# Altium PCB PCB2.PcbDoc
Units mm, origin at the board's own origin, x right, y up, seen from the top; angles counter-clockwise.
Board outline 152.4 x 101.6 mm, 4 copper layers (Top Layer, Layer 1, Layer 2, Bottom Layer), stack 0.568 mm thick; 58 components, 36 nets, 144 pads, 0 vias.
Unrouted connection lines stored in the file: 105.
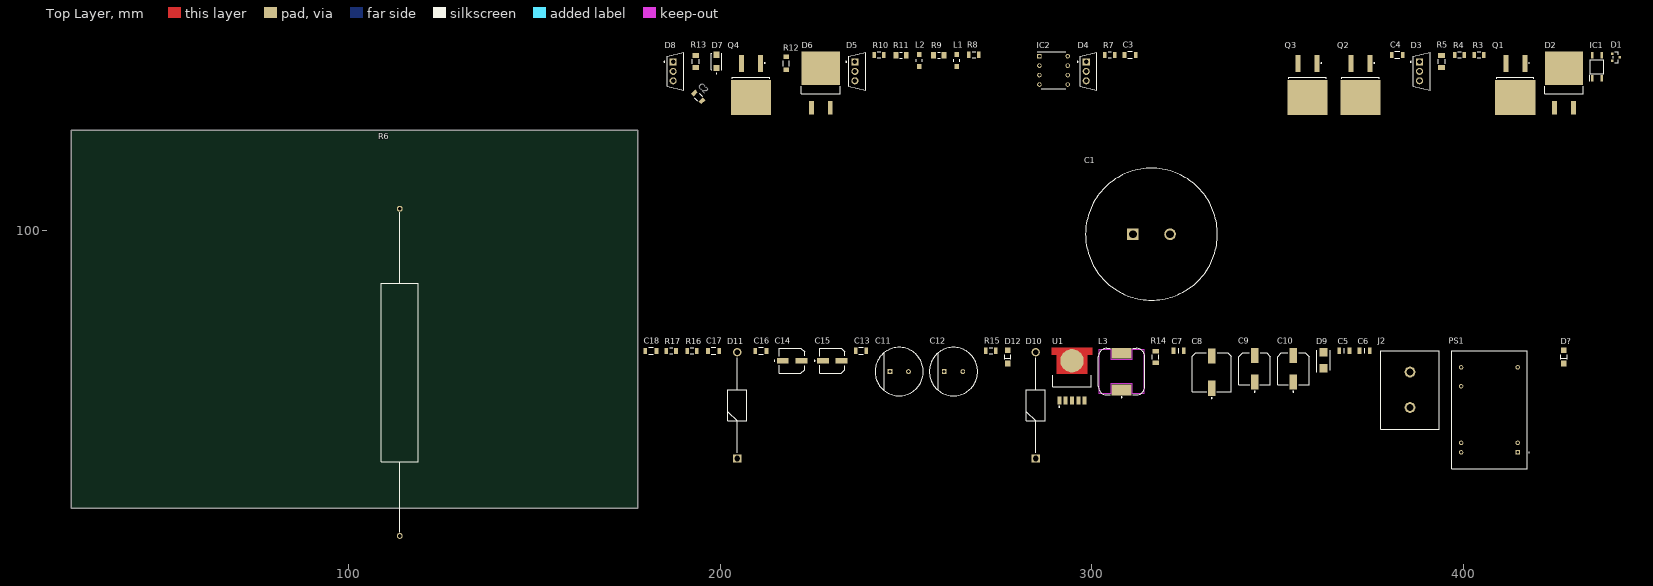
[diagram p0: Top Layer view]
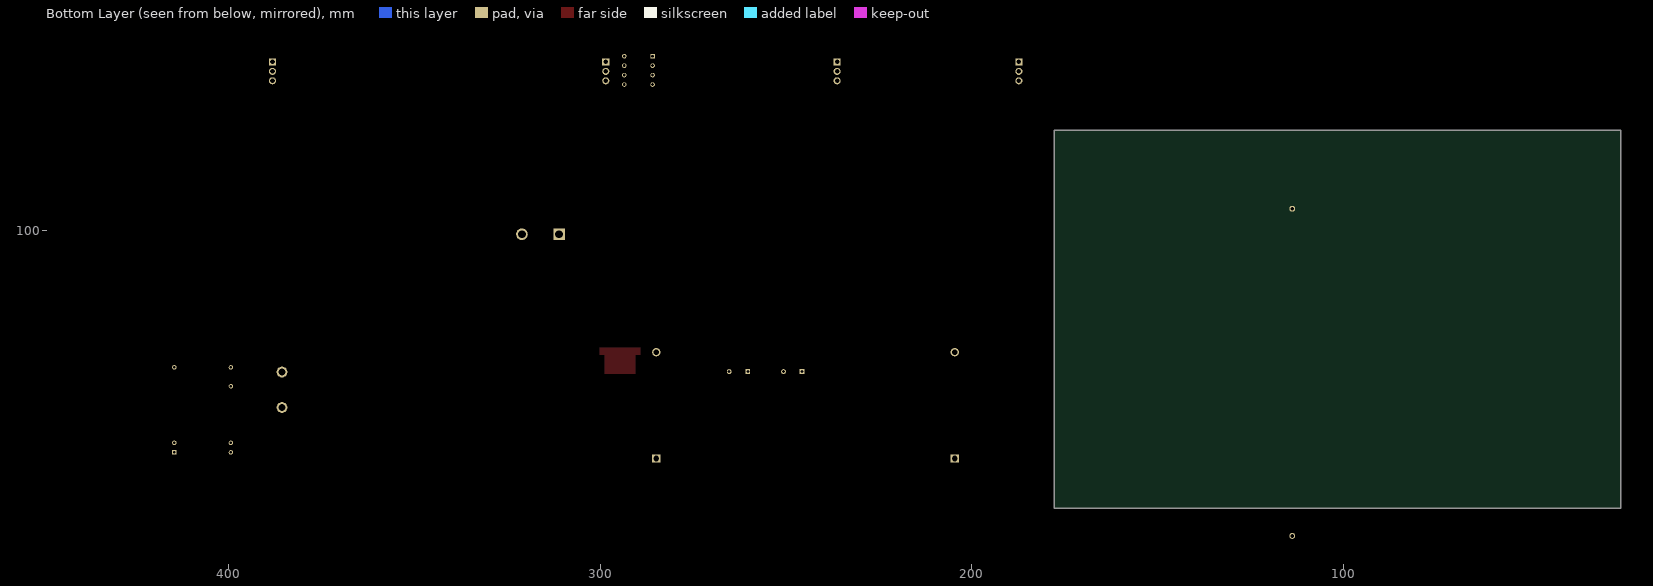
[diagram p1: Bottom Layer view, seen from below]
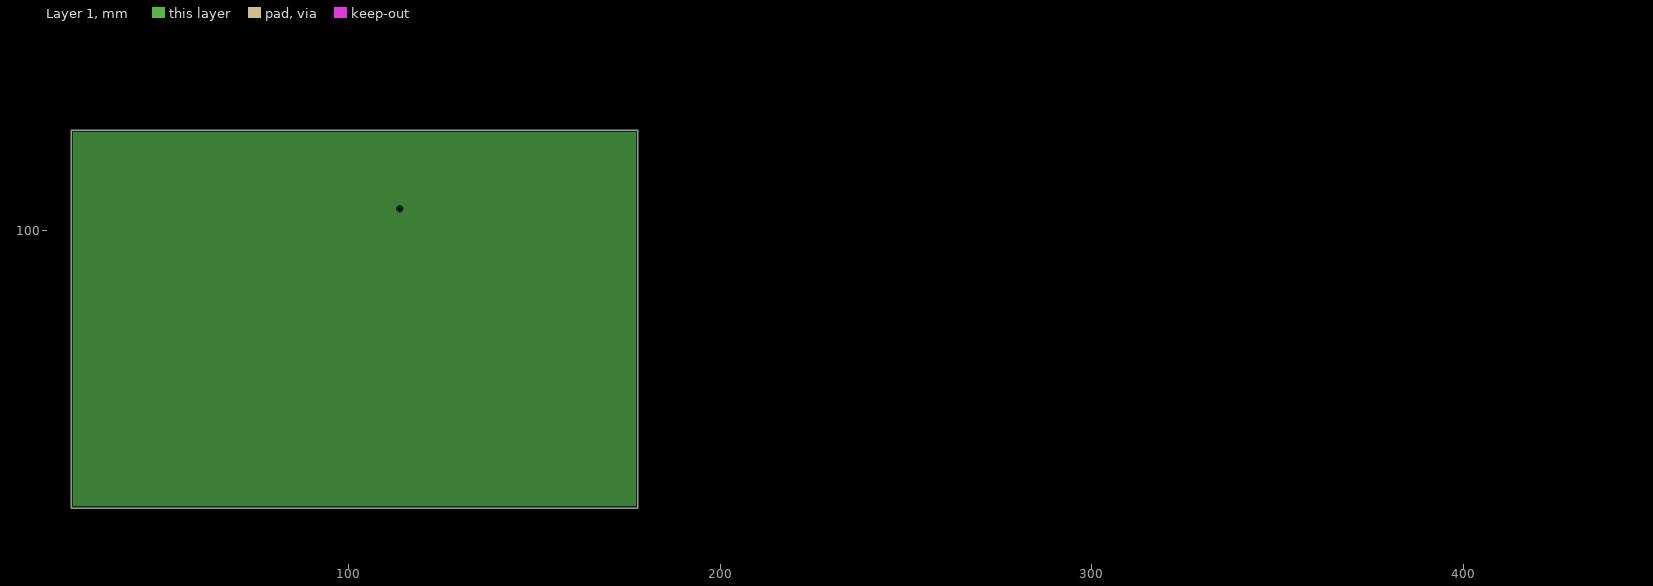
[diagram p2: Layer 1, clearances drawn from the general rule]

## Layer stack, top to bottom
Top Solder: solder mask 0.0102, Solder Resist, Dk 3.5
Top Layer: signal copper 0.0356
Dielectric 2: prepreg 0.0711, PP-006, Dk 4.1
Layer 1: plane copper 0.0175
Dielectric 1: dielectric 0.32, FR-4, Dk 4.8
Layer 2: signal copper 0.0175
Dielectric 3: prepreg 0.0711, PP-006, Dk 4.1
Bottom Layer: signal copper 0.0356
Bottom Solder: solder mask 0.0102, Solder Resist, Dk 3.5

## Board outline
25.4,25.4 177.8,25.4 177.8,127 25.4,127

## Design rules (kind name [scope] priority, off if disabled: settings)
AssemblyTestPointUsage [All] p1 off:
AssemblyTestpoint [All] p1 off: testpointundercomponent=TRUE minsize=1.016 maxsize=2.54 preferedsize=1.524 minholesize=0 maxholesize=1.016 preferedholesize=0.813 testpointgrid=0.025 usegrid=TRUE gridtolerance=0 allowsidetop=TRUE allowsidebottom=TRUE
Clearance Clearance_1 [All vs InPolygon] p1: gap=0.33 ignorepadtopadclearanceinfootprint=FALSE except(0: Arc-Hole Track-Hole SMDPad-Hole THPad-Hole Via-Hole Fill-Hole Poly-Hole Region-Hole Text-Hole)
Clearance [All] p2: gap=0.178 ignorepadtopadclearanceinfootprint=FALSE except(0: Arc-Hole Track-Hole SMDPad-Hole THPad-Hole Via-Hole Fill-Hole Poly-Hole Region-Hole Text-Hole)
ComponentClearance [All] p1 off: gap=0.254 collisioncheckmode=3 verticalgap=0.254 showdistances=FALSE
FabricationTestPointUsage [All] p1 off: valid=0 allowmultiple=FALSE
FabricationTestpoint [All] p1 off: side=3 testpointundercomponent=TRUE minsize=1.016 maxsize=2.54 preferedsize=1.524 minholesize=0 maxholesize=1.016 preferedholesize=0.813 testpointgrid=0.025 allowsidetop=TRUE allowsidebottom=TRUE usegrid=TRUE gridtolerance=0
Height [All] p1 off: minheight=0 maxheight=100 prefheight=12.7
HoleSize [All] p1 off: absolutevalues=TRUE maxlimit=2.54 minlimit=0.025 maxpercent=80.000 minpercent=20.000
HoleToHoleClearance [All] p1 off: gap=0.254 allowstackedmicrovias=TRUE
LayerPairs [All] p1 off: enforce=TRUE
MinimumSolderMaskSliver [All] p1 off: minsoldermaskwidth=0.254
NetAntennae [All] p1 off: netantennaetolerance=0
PasteMaskExpansion [All] p1 off: expansion=0
PlaneClearance [All] p1: clearance=0.508
PlaneConnect [All] p1: planeconnectstyle=Direct reliefexpansion=0.508 reliefentries=4 reliefconductorwidth=0.254 reliefairgap=0.254
PolygonConnect [All] p1: connectstyle=Direct reliefconductorwidth=0.254 reliefentries=4 polygonreliefangle="90 Angle" airgapwidth=0.254
RoutingVias [All] p1: holewidth=0.4 width=0.8 viastyle="Through Hole" minholewidth=0.3 minwidth=0.6 maxholewidth=0.711 maxwidth=1.27
SilkToSilkClearance [All] p1 off: silktosilkclearance=0.254
SilkToSolderMaskClearance [IsPad] p1 off: minsilkscreentomaskgap=0.254 clearancetoexposedcopper=TRUE
SolderMaskExpansion [All] p1 off: expansion=0.102 istentingtop=FALSE
Width [All] p1: maxlimit=2.54 minlimit=0.254 preferedwidth=0.254
14 further rules are at their usual default settings.

## Classes and differential pairs
component class Power: C5 C6 C7 C8 C9 C10 C11 C12 C13 C14 C15 C16 C17 C18 D9 D10 D11 D12 D? J2 L3 PS1 R14 R15 R16 R17 U1
component class Sheet1: C1 C2 C3 C4 D1 D2 D3 D4 D5 D6 D7 D8 IC1 IC2 J1 L1 L2 Q1 Q2 Q3 Q4 R1 R2 R3 R4 R5 R6 R7 R8 R9 R10 R11 R12 R13

## Components (designator, comment, footprint, x,y, rotation, side; value= is the part's Value field where it differs from the comment)
C1 "33000uF/50v" CAPPRD1000W190D3550H8200 311.023,99.06 r0 top
C2 "GRM31CR71E106KA12L" FP-GRM31C-0_2-e0_3_0_8-MFG 194.083,135.99 r315 top
C3 "12065C104KAT2A" FP-1206-L_3_2_0_2-W_1_6_0-MFG 310.261,147.32 r0 top
C4 "12065C104KAT2A" FP-1206-L_3_2_0_2-W_1_6_0-MFG 382.143,147.32 r0 top
C5 "100nF" CAPC3216X95N 367.919,67.691 r0 top
C6 "100nF" CAPC3216X95N 373.38,67.691 r0 top
C7 "100nF" CAPC3216X95N 323.342,67.691 r0 top
C8 "1000uF/16V" FP-FTG-MFG 332.232,61.976 r90 top
C9 "470uF/25V" FP-FTF-MFG 343.789,62.865 r90 top
C10 "470uF/25V" FP-FTF-MFG 354.203,62.865 r90 top
C11 "1000uF-50V" FP-RAD-TH-D_12_5_0_5-L_25-MFG 248.158,62.103 r0 top
C12 "1000uF-50V" FP-RAD-TH-D_12_5_0_5-L_25-MFG 262.763,62.103 r0 top
C13 "1000uF" FP-C1206C-EB-MFG 237.871,67.691 r0 top value="0.10 μF"
C14 "10uF-50V" FP-FKD-MFG 219.329,65.024 r0 top
C15 "10uF-50V" FP-FKD-MFG 230.124,65.024 r0 top
C16 "100nF/50V" FP-1206-L_3_2_0_2-W_1_6_0-MFG 210.947,67.691 r0 top
C17 "100nF/50V" FP-1206-L_3_2_0_2-W_1_6_0-MFG 198.247,67.691 r0 top
C18 "100nF/50V" FP-1206-L_3_2_0_2-W_1_6_0-MFG 181.356,67.691 r0 top
D1 "BAV99,215" FP-SOT23-MFG 440.944,146.685 r0 top
D2 "STTH30L06GY-TR" FP-D2PAK-MFG 426.974,139.7 r0 top
D3 "MBR20100CT-E3/4W" FP-MBR20100CT-E3-4W-MFG 388.747,142.875 r0 top
D4 "MBR20100CT-E3/4W" FP-MBR20100CT-E3-4W-MFG 299.085,142.875 r0 top
D5 "MBR20100CT-E3/4W" FP-MBR20100CT-E3-4W-MFG 236.855,142.875 r0 top
D6 "STTH30L06GY-TR" FP-D2PAK-MFG 227.076,139.7 r0 top
D7 "US1M-E3/61T" FP-95400-MFG 199.009,145.542 r90 top value=10pF
D8 "MBR20100CT-E3/4W" FP-MBR20100CT-E3-4W-MFG 187.96,142.875 r0 top
D9 "SMBJ20CA" DIOM5336X245N 362.331,65.151 r90 top
D10 "MBR360G" DIOAD2860W130L840D505 284.861,38.735 r90 top
D11 "MBR360G" DIOAD2860W130L840D505 204.597,38.735 r90 top
D12 "HSMG-C150" FP-HSMG-C150-MFG 277.368,66.04 r90 top
D? "HSMG-C150" FP-HSMG-C150-MFG 426.974,66.04 r90 top
IC1 "PC357N14J00F" SOP254P675X300-4N 435.864,144.145 r90 top
IC2 "TLP350_TP1,F_" DIP762W60P254L966H485Q8N 289.687,143.129 r0 top
J2 "38720-7502" 387207502 385.572,52.451 r90 top
L1 "74279216" SMD-1206 263.652,145.796 r90 top
L2 "74279216" SMD-1206 253.492,145.796 r90 top
L3 "7447709102" WE-PD_1210 307.975,62.103 r0 top
PS1 "MIWI06-24S05" MIWI06_S 414.528,40.386 r90 top
Q1 "IRFS4010PBF" IDB30E60 413.893,138.684 r90 top
Q2 "IRFS4010PBF" IDB30E60 372.237,138.684 r90 top
Q3 "IRFS4010PBF" IDB30E60 358.013,138.684 r90 top
Q4 "IRFS4010PBF" IDB30E60 208.28,138.684 r90 top
R3 "CRGCQ1206J3K3" FP-CRGCQ1206-IPC_C 404.114,147.32 r0 top value=3.3KΩ
R4 "CRGCQ1206J2K2" FP-CRGCQ1206-IPC_C 398.907,147.32 r0 top value=2.2KΩ
R5 "RC3216J273CS" FP-RC3216-IPC_A 394.081,145.542 r90 top
R6 "CP001010R00JE66" CP001027K00JE663 113.792,17.91 r90 top
R7 "CRGCQ1206J2K2" FP-CRGCQ1206-IPC_C 304.8,147.32 r0 top value=2.2KΩ
R8 "CRCW12061K50FKEA" FP-CRCW1206-e3-IPC_C 268.224,147.32 r0 top
R9 "ERA8AEB101V" RESC3216X70X50NL20T25 258.826,147.193 r0 top
R10 "CRGCQ1206F3K3" FP-CRGCQ1206-IPC_C 242.697,147.32 r0 top value=3.3KΩ
R11 "ERA8AEB101V" RESC3216X70X50NL20T25 248.666,147.193 r0 top
R12 "ERJ-8ENF1502V" FP-ERJ8EN-MFG 217.805,145.034 r90 top
R13 "RC3216J273CS" FP-RC3216-IPC_A 193.421,145.542 r90 top
R14 "1K" FP-CR1206-IPC_A 317.119,66.04 r90 top
R15 "10K" FP-CRCW1206-e3-IPC_C 272.796,67.691 r0 top
R16 "2K2" FP-CRGCQ1206-IPC_C 192.405,67.691 r0 top value=2.2KΩ
R17 "1K2" FP-CRGCQ1206-IPC_C 186.817,67.691 r0 top value=1.2KΩ
U1 "LM2576HVSX-12/NOPB" FP-KTT0005B-MFG 294.64,62.484 r0 top

## Footprints (in the part's own frame and the unit in brackets; to place one, negate y for a bottom-side part, rotate by r counter-clockwise, add the part's x,y. Pads: shape width x height; smd on the part's side, far side on the other; paste and mask are expansions set on the pad)
387207502 [mm]
  round 2.895 hole 1.93: 1(0,0) 2(9.53,0)
  silkscreen extent -5.81,-7.83 15.29,7.87, body extent -5.8,-7.85 15.28,7.89, height 16.73
CAPC3216X95N [mm]
  rect 1.04x1.78 smd: 1(-1.37,0) 2(1.37,0)
  silkscreen extent 0,-0.7 0,0.7, body extent -1.6,-0.8 1.6,0.8, height 0.95
CAPPRD1000W190D3550H8200 [mm]
  rect 3.15x3.15 hole 2.1: 1(0,0)
  round 3.15 hole 2.1: 2(10,0)
  silkscreen extent -12.75,-17.75 22.75,17.75, body extent -12.96,-17.99 23,17.99, height 82
CP001027K00JE663 [mm]
  round 1.575 hole 1.05: 1(0,0) 2(88,0)
  silkscreen extent 1,-5 87,5, body extent -17.91,-4.76 105.91,4.76, height 11.91
DIOAD2860W130L840D505 [mm]
  rect 2.25x2.25 hole 1.5: 1(0,0)
  round 2.25 hole 1.5: 2(28.6,0)
  silkscreen extent 1.48,-2.52 27.13,2.52, body extent -0.65,-2.65 29.25,2.65, height 5.29
DIOM5336X245N [mm]
  rect 2.3x2.15 smd: 1(-2.15,0) 2(2.15,0)
  silkscreen extent -3.22,-1.81 2.67,1.81, body extent -2.67,-1.81 2.67,1.81, height 2.45
DIP762W60P254L966H485Q8N [mm]
  rect 1.2x1.2 hole 0.8: 1(-3.81,3.81)
  round 1.2 hole 0.8: 2(-3.81,1.27) 3(-3.81,-1.27) 4(-3.81,-3.81) 5(3.81,-3.81) 6(3.81,-1.27) 7(3.81,1.27) 8(3.81,3.81)
  silkscreen extent -4.41,-4.95 3.32,4.95, body extent -3.96,-4.83 3.96,4.83, height 4.85
FP-1206-L_3_2_0_2-W_1_6_0-MFG [mm]
  rect 1x1.6 smd paste+0 mask+0: 1(-1.5,0) 2(1.5,0)
  silkscreen extent -0.63,-0.9 0.63,0.9, body extent -2.1,-1 2.1,1, height 0.25
FP-95400-MFG [mm]
  rect 1.7x1.68 smd paste+0 mask+0: 1(-1.79,0) 2(1.79,0)
  silkscreen extent -3.37,-1.4 2.25,1.4, body extent -2.74,-1.5 2.74,1.5, height 0.25
FP-C1206C-EB-MFG [mm]
  rect 0.95x1.7 smd paste+0 mask+0: 1(-1.4,0) 2(1.4,0)
  silkscreen extent -0.55,-0.9 0.55,0.9, body extent -2,-1 2,1, height 0.25
FP-CR1206-IPC_A [mm]
  rect 1.258x1.762 smd paste+0 mask+0: 1(-1.527,0) 2(1.527,0)
  silkscreen extent -0.6,-0.88 0.6,0.88, body extent -2.66,-1.38 2.66,1.38, height 0.25
FP-CRCW1206-e3-IPC_C [mm]
  rect 0.956x1.658 smd paste+0 mask+0: 1(-1.326,0) 2(1.326,0)
  silkscreen extent -0.47,-0.8 0.47,0.8, body extent -1.9,-0.97 1.9,0.97, height 0.25
FP-CRGCQ1206-IPC_C [mm]
  rect 0.956x1.61 smd paste+0 mask+0: 1(-1.301,0) 2(1.301,0)
  silkscreen extent -0.45,-0.77 0.45,0.77, body extent -1.88,-0.95 1.88,0.95, height 0.25
FP-D2PAK-MFG [mm]
  rect 1.3x3.7 smd paste+0 mask+0: 1(-2.54,-6.6) 3(2.54,-6.6)
  rect 10.3x8.9 smd paste+0 mask+0: 4(0,4)
  silkscreen extent -5.2,-2.87 5.2,-0.82, body extent -5.3,-8.55 5.3,8.55, height 0.25
FP-ERJ8EN-MFG [mm]
  rect 1.25x1.5 smd paste+0 mask+0: 1(-1.725,0) 2(1.725,0)
  silkscreen extent -0.72,-0.82 0.72,0.82, body extent -2.45,-0.92 2.45,0.92, height 0.25
FP-FKD-MFG [mm]
  rect 3.2x1.6 smd paste+0 mask+0: 1(-2.5,0) 2(2.5,0)
  silkscreen extent -4.85,-3.4 3.4,3.4, body extent -4.35,-3.65 4.35,3.65, height 0.25
FP-FTF-MFG [mm]
  rect 4x2 smd paste+0 mask+0: 1(-3.55,0) 2(3.55,0)
  silkscreen extent -6.27,-4.25 4.25,4.25, body extent -5.8,-4.5 5.8,4.5, height 0.25
FP-FTG-MFG [mm]
  rect 4.1x2 smd paste+0 mask+0: 1(-4.35,0) 2(4.35,0)
  silkscreen extent -7.12,-5.25 5.25,5.25, body extent -6.65,-5.5 6.65,5.5, height 0.25
FP-GRM31C-0_2-e0_3_0_8-MFG [mm]
  rect 1.05x1.6 smd paste+0 mask+0: 1(-1.475,0) 2(1.475,0)
  silkscreen extent -0.57,-0.9 0.58,0.9, body extent -2.1,-1 2.1,1, height 0.25
FP-HSMG-C150-MFG [mm]
  rect 1.5x1.5 smd paste+0 mask+0: 1(-1.75,0) 2(1.75,0)
  silkscreen extent -0.6,-0.85 0.6,0.85, body extent -2.6,-0.95 2.6,0.95, height 0.25
FP-KTT0005B-MFG [mm]
  rect 1.07x2.16 smd paste+0 mask+0: 1(-3.4,-8.13) 2(-1.7,-8.13) 3(0,-8.13) 4(1.7,-8.13) 5(3.4,-8.13)
  round 6.291 smd paste+0 mask+0: 6(0,2.545)
  Top Layer region: -5.4,6.04 5.4,6.04 5.4,4.13 4.165,4.13 4.165,-0.95 -4.165,-0.95 -4.165,4.13 -5.4,4.13 -5.4,6.04
  silkscreen extent -5.21,-9.95 5.21,-1.33, body extent -5.5,-9.31 5.5,6.14, height 0.25
FP-MBR20100CT-E3-4W-MFG [mm]
  rect 1.9x1.9 hole 1.25 paste-1000 mask+0: 1(-0.61,2.55)
  round 1.9 hole 1.25 paste-1000 mask+0: 2(-0.61,0) 3(-0.61,-2.55)
  silkscreen extent -3.07,-5.08 2.25,5.08, body extent -2.45,-5.37 2.45,5.37, height 0.25
FP-RAD-TH-D_12_5_0_5-L_25-MFG [mm]
  rect 1.3x1.3 hole 0.8 paste-1000 mask+0: 1(-2.5,0)
  round 1.3 hole 0.8 paste-1000 mask+0: 2(2.5,0)
  silkscreen extent -6.5,-6.5 6.5,6.5, body extent -6.6,-6.6 6.6,6.6, height 0.25
FP-RC3216-IPC_A [mm]
  rect 1.355x1.858 smd paste+0 mask+0: 1(-1.576,0) 2(1.576,0)
  silkscreen extent -0.6,-0.93 0.6,0.93, body extent -2.75,-1.43 2.75,1.43, height 0.25
FP-SOT23-MFG [mm]
  rect 0.7x0.6 smd paste-1000 mask+0: 1(-1,0.95) 2(-1,-0.95) 3(1,0)
  silkscreen extent -0.7,-1.5 0.7,1.5, body extent -1.5,-1.65 1.5,1.65, height 0.25
IDB30E60 [mm]
  rect 4.6x1.35 smd: 1(6.315,-2.55) 3(6.315,2.55)
  rect 9.4x10.8 smd: 2(-2.835,0)
  silkscreen extent 2.16,-5.02 6.5,5.02, body extent -6.94,-5 8.02,5, height 4.4
MIWI06_S [mm]
  rect 1.2x1.2 hole 0.7: 2(0,0)
  round 1.2 hole 0.7: 3(2.54,0) 11(22.86,0) 14(22.86,15.22) 16(17.78,15.22) 22(2.54,15.22) 23(0,15.22)
  silkscreen extent -4.44,-3.1 27.36,17.76, body extent -4.41,-2.48 27.27,17.72, height 11
RESC3216X70X50NL20T25 [mm] "Chip Resistor, 2-Leads, Body 3.20x1.60mm, IPC Medium Density"
  rect 1.3x1.8 smd: 1(-1.4,0) 2(1.4,0)
  silkscreen extent -0.35,-0.8 0.35,0.8, body extent -1.7,-0.9 1.7,0.9, height 0.7
SMD-1206 [mm] "Chip Inductor, 2-Leads, Body 3.2x1.6mm"
  rect 1.35x1.2 smd: 1(-1.675,0) 2(1.675,0)
  silkscreen extent -0.35,-0.8 0.35,0.8, body extent -1.6,-0.8 1.6,0.8, height 1.09
SOP254P675X300-4N [mm]
  rect 1.75x0.65 smd: 1(-3.075,1.27) 2(-3.075,-1.27) 3(3.075,-1.27) 4(3.075,1.27)
  silkscreen extent -3.95,-1.8 1.85,1.94, body extent -3.5,-1.8 3.5,1.8, height 3
WE-PD_1210 [mm] "SMT Shielded Power Inductor, 2-leads, body 12x12mm"
  rect 5.4x2.9 smd: 1(0,-4.95) 2(0,4.95)
  Top Layer keep-out region: -6,6 -2.9,6 -2.9,3.3 2.9,3.3 2.9,6 6,6 6,-6 2.9,-6 2.9,-3.3 -2.9,-3.3 -2.9,-6 -6,-6
  silkscreen extent -6.25,-7.02 6.25,6.25, body extent -6,-6 6,6, height 9.46

## Part data
C1: library part 380LX333M050A082, "Capacitor Polarised", Manufacturer_Name="Cornell Dubilier", Mouser Part Number=598-80LX333M050A082, Datasheet Link=https://componentsearchengine.com/Datasheets/1/380LX333M050A082.pdf, Height=82mm, Manufacturer_Part_Number=380LX333M050A082, Mouser Price/Stock=https://www.mouser.com/Search/Refine.aspx?Keyword=598-80LX333M050A082
C2: library part CMP-06035-003589-1, "Chip Multilayer Ceramic Capacitors for General Purpose, 1206, 10uF, X7R, 15%, 10%, 25V", Capacitance=10uF, Case Code (Imperial)=1206, Case Code (Metric)=3216, Dielectric=X7R, Max Operating Temperature=125°C, Min Operating Temperature=-55°C, Package Quantity=1, Tolerance=10%, Voltage=25V, Case/Package=1206, Depth=1.6mm, Height=1.6mm, Lead Free="Lead Free", Length=3.2mm, Material=Ceramic, Mount="Surface Mount", Number of Pins=2, Packaging="Tape and Reel", Radiation Hardening=No, REACH SVHC="No SVHC", Termination=SMD/SMT, Thickness=0.071inch, Voltage Rating=25V, Voltage Rating (DC)=25V, Width=1.6mm
C3 C4: library part CMP-2000-05018-2, "General Purpose Ceramic Capacitor, 1206, 100nF, 10%, X7R, 15%, 50V", Capacitance=100nF, Case Code (Imperial)=1206, Case Code (Metric)=3216, Dielectric=X7R, Dielectric Material=Ceramic, Insulation Resistance=100GR, Max Operating Temperature=125°C, Min Operating Temperature=-55°C, Package Quantity=1, Tolerance=10%, Voltage=50V, Case/Package=1206, Construction=Flat, Contact Plating=Tin, Depth=1.6mm, Dissipation Factor=2.5%, Height=0.94mm, Lead Free="Lead Free", Length=3.2mm, Mount="Surface Mount", Number of Pins=2, Packaging="Tape and Reel", Radiation Hardening=No, REACH SVHC="No SVHC", RoHS Compliant=Yes, Series=-, Termination=SMD/SMT, Thickness=0.037inch, Voltage Rating=50V, Voltage Rating (DC)=50V, Width=1.6mm
C5 C6 C7: library part GRM319F51H104ZA01D, "Capacitor", Manufacturer_Name="Murata Electronics", Mouser Part Number=81-GRM319F51H104ZA, Arrow Part Number=GRM319F51H104ZA01D, Arrow Price/Stock=https://www.arrow.com/en/products/grm319f51h104za01d/murata-manufacturing, Datasheet Link=http://www.murata.com/~/media/webrenewal/support/library/catalog/products/capacitor/mlcc/c02e.pdf, Height=0.95mm, Manufacturer_Part_Number=GRM319F51H104ZA01D, Mouser Price/Stock=https://www.mouser.com/Search/Refine.aspx?Keyword=81-GRM319F51H104ZA
C8: library part CMP-05427-000086-1, "CAP ALUM 1000UF 20% 16V SMD", Capacitance=1mF, Case/Package=Radial, ESR (Equivalent Series Resistance)=60mR, Leakage Current=160uA, Max Operating Temperature=105°C, Min Operating Temperature=-55°C, Package Quantity=1, Ripple Current=1.19A, Tolerance=20%, Voltage=16V, Construction=Cylindrical, Diameter=10mm, Height=10.2mm, Height - Seated (Max)=0.413inch, Lead Diameter=0.9mm, Lead Free="Lead Free", Lead Pitch=4.6mm, Length=10.2mm, Life (Hours)=2000Hour, Mount="Surface Mount", Packaging="Tape and Reel", Radiation Hardening=No, REACH SVHC="No SVHC", Ripple Current (AC)=1.19A, RoHS Compliant=Yes, Series=FT, Termination=SMD/SMT, Voltage Rating=16V, Voltage Rating (DC)=16V
C9 C10: library part CMP-05427-000040-1, "CAP ALUM 470UF 20% 25V SMD", Capacitance=470uF, Case/Package=Radial, Dielectric Material=Aluminium, ESR (Equivalent Series Resistance)=80mR, Leakage Current=117.5uA, Max Operating Temperature=105°C, Min Operating Temperature=-55°C, Package Quantity=500, Ripple Current=850mA, Tolerance=20%, Voltage=25V, Construction=Cylindrical, Contact Plating=Tin, Diameter=8mm, Features="General Purpose", Height=10.2mm, Height - Seated (Max)=0.413inch, Lead Diameter=0.9mm, Lead Free="Lead Free", Lead Pitch=3.1mm, Length=10.2mm, Life (Hours)=2000Hour, Mount="Surface Mount", Number of Pins=2, Packaging="Tape and Reel", Radiation Hardening=No, REACH SVHC="No SVHC", Ripple Current (AC)=850mA, RoHS Compliant=Yes, Series=FT, Termination=SMD/SMT, Voltage Rating=25V, Voltage Rating (DC)=25V
C11 C12: library part CMP-05427-001975-1, "Aluminum Electrolytic Capacitors (Radial Lead Type) 1000uF ±20% 50V", Capacitance=1mF, Case/Package=Radial, Max Operating Temperature=85°C, Min Operating Temperature=-40°C, Package Quantity=200, Ripple Current=1.05A, Tolerance=20%, Voltage Rating=50V, Construction=RADIAL, Diameter=12.5mm, Dissipation Factor=0.12%, Height=25mm, Height - Seated (Max)=1.063inch, Lead Diameter=0.6mm, Lead Pitch=5mm, Lead/Base Style=Straight, Length=25mm, Life (Hours)=2000Hour, Mount="Through Hole", Packaging=Bulk, Polarity=Polar, Radiation Hardening=No, REACH SVHC="No SVHC", RoHS Compliant=Yes, Series=M, Termination=Radial, Voltage Rating (DC)=50V
C13: library part CMP-1037-04222-2, "CAP CER 0.1UF 200V 10% X7R 1206", Capacitance="0.10 μF", Manufacturer=KEMET, Manufacturer Part Number=C1206C104K2RACTU, Package=C1206C-EB, Temperature="-55°C to +150°C", Temperature Characteristic=X7R, Temperature Coefficient=15%, Temperature Range High=+150°C, Temperature Range Low=-55°C, Tolerance=0.1, Voltage Rating="200 V", Automotive=Yes, Automotive Grade="Grade 0", Category=Cap, ComponentLink2Description=Datasheet, ComponentLink2URL=https://content.kemet.com/datasheets/KEM_C1007_X8R_ULTRA_150C_SMD.pdf, Device Class L1="Passive Components", Device Class L2=Capacitors, Device Class L3="Ceramic Capacitors", Digikey Description="CAP CER 0.1UF 200V 10% X7R 1206", Height=0.88mm, Ipc Land Pattern Name=CAPC320160X78, Lead Free=Yes, Material=Ceramic, Mouser Description="Multilayer Ceramic Capacitors MLCC - SMD/SMT 200volts 0.1uF X7R 10%", Octopart=https://octopart.com/c1206c104k2ractu-kemet-9138344, RoHS=TRUE
C14 C15: library part CMP-2000-06207-2, "CAP ALUM 10UF 20% 50V SMD", Capacitance=10uF, Case/Package=Radial, ESR (Equivalent Series Resistance)=880mR, Leakage Current=3uA, Max Operating Temperature=105°C, Min Operating Temperature=-55°C, Package Quantity=1000, Ripple Current=165mA, Tolerance=20%, Voltage=50V, Construction=Cylindrical, Contact Plating=Tin, Diameter=6.3mm, Height=5.8mm, Height - Seated (Max)=0.24inch, Impedance=880mR, Lead Diameter=0.65mm, Lead Free="Lead Free", Lead Pitch=1.8mm, Length=5.8mm, Life (Hours)=2000Hour, Mount="Surface Mount", Number of Pins=2, Packaging="Tape and Reel", Polarity=Polar, Radiation Hardening=No, REACH SVHC="No SVHC", Ripple Current (AC)=165mA, RoHS Compliant=Yes, Series=FK, Size=5.8mm, Termination=SMD/SMT, Voltage Rating=50V, Voltage Rating (DC)=50V, Width=7.8mm
C16 C17 C18: library part CMP-2000-05018-2, "General Purpose Ceramic Capacitor, 1206, 100nF, 50V", Capacitance=100nF, Case Code (Imperial)=1206, Case Code (Metric)=3216, Dielectric=X7R, Dielectric Material=Ceramic, Insulation Resistance=100GR, Max Operating Temperature=125°C, Min Operating Temperature=-55°C, Package Quantity=1, Tolerance=10%, Voltage=50V, Case/Package=1206, Construction=Flat, Contact Plating=Tin, Depth=1.6mm, Dissipation Factor=2.5%, Height=0.94mm, Lead Free="Lead Free", Length=3.2mm, Mount="Surface Mount", Number of Pins=2, Packaging="Tape and Reel", Radiation Hardening=No, REACH SVHC="No SVHC", RoHS Compliant=Yes, Series=-, Termination=SMD/SMT, Thickness=0.037inch, Voltage Rating=50V, Voltage Rating (DC)=50V, Width=1.6mm
D1: library part CMP-14399-000006-1, "DIODE ARRAY GP 100V 215MA SOT23"
D2 D6: library part CMP-12188-000013-1, "DIODE GEN PURP 600V 30A D2PAK", Forward Current=30A, Manufacturer=STMicroelectronics, Max Junction Temp=+175°C, Max Repetitive Reverse Voltage=600V, Max Surge Forward Current=300A, Package=D2PAK, Peak Reverse Current=25uA, Temperature="-40°C to +175°C", Temperature Range Low=-40°C, Automotive=Yes, Automotive Grade="Grade 0", Category=Diode, ComponentLink2Description=Datasheet, ComponentLink2URL=https://www.st.com/resource/en/datasheet/stth30l06-y.pdf, Device Class L1="Discrete Semiconductors", Device Class L2=Diodes, Device Class L3="Rectifier Diodes", Digikey Description="DIODE GEN PURP 600V 30A D2PAK", Height=4.83mm, Lead Free=Yes, Manufacturer Part Number=STTH30L06GY-TR, Octopart=https://octopart.com/stth30l06gy-tr-stmicroelectronics-26451410, RoHS=TRUE, Standoff Height=0.03mm, Temperature Range High=+175°C
D3 D4 D5 D8: library part CMP-00030-42878425-1, "MBR20100CT-E3/4W Dual Common-Cathode High-Voltage Schottky Rectifier", Average Rectified Current=10A, Case/Package=TO-220AB, Forward Current=20A, Forward Voltage=800mV, Max Forward Surge Current (Ifsm)=150A, Max Junction Temperature (Tj)=150°C, Max Repetitive Reverse Voltage (Vrrm)=100V, Max Reverse Leakage Current=100µA, Min Operating Temperature=-65°C, Element Configuration="Common Cathode", Height=15.3162mm, Lead Free="Lead Free", Length=10.5156mm, Max Operating Temperature=150°C, Max Reverse Voltage (DC)=100V, Max Surge Current=150A, Mount="Through Hole", NexarPartId=42878425, Number of Pins=3, Peak Non-Repetitive Surge Current=150A, Peak Reverse Current=100µA, Radiation Hardening=No, Reverse Voltage=100V, RoHS=Compliant, Schedule B="8541100080, 8541100080", Width=4.699mm
D7: library part CMP-02540-000006-1, "DIODE GEN PURP 1KV 1A DO214AC", Capacitance=10pF, Forward Current=1A, Manufacturer=Vishay, Max Junction Temp=+150°C, Max Repetitive Reverse Voltage=1000V, Max Surge Forward Current=30A, Package=95400, Peak Reverse Current=10uA, Temperature="-55°C to +150°C", Temperature Range Low=-55°C, Automotive=No, Category=Diode, ComponentLink2Description=Datasheet, ComponentLink2URL=https://www.vishay.com/docs/88768/us1.pdf, Device Class L1="Discrete Semiconductors", Device Class L2=Diodes, Device Class L3="Rectifier Diodes", Digikey Description="DIODE GEN PURP 1KV 1A DO214AC", Footprint Url=https://www.vishay.com/docs/95400/sma.pdf, Height=2.29mm, Lead Free=Yes, Manufacturer Part Number=US1M-E3/61T, Mouser Description="On a Reel of 1800, Vishay 1000V 1A, Silicon Junction Diode, 2-Pin DO-214AC US1M-E3/61T", Octopart=https://octopart.com/us1m-e3%2F61t-vishay-39553152, Reverse Voltage=1000V, RoHS=TRUE, Standoff Height=0mm, Temperature Range High=+150°C
D9: "TVS Diode (Bi-directional)", Manufacturer_Name=onsemi, Mouser Part Number=512-SMBJ20CA, Arrow Part Number=SMBJ20CA, Arrow Price/Stock=https://www.arrow.com/en/products/smbj20ca/on-semiconductor, Datasheet Link=https://componentsearchengine.com/Datasheets/1/SMBJ20CA.pdf, Height=2.45mm, Manufacturer_Part_Number=SMBJ20CA, Mouser Price/Stock=https://www.mouser.co.uk/ProductDetail/onsemi-Fairchild/SMBJ20CA?qs=iN0KuJO79Ka3il%2FXEzRA3A%3D%3D
D10 D11: "Schottky Diode", Manufacturer_Name=onsemi, Mouser Part Number=863-MBR360G, Arrow Part Number=MBR360G, Arrow Price/Stock=https://www.arrow.com/en/products/mbr360g/on-semiconductor?region=nac, Datasheet Link=https://www.onsemi.com/pub/Collateral/MBR350-D.PDF, Manufacturer_Part_Number=MBR360G, Mouser Price/Stock=https://www.mouser.co.uk/ProductDetail/onsemi/MBR360G?qs=3JMERSakebrDB2Vj%252Bnts6A%3D%3D
D12 D?: library part CMP-2000-05061-2, "LED GREEN DIFFUSED 1206 SMD", Colour=Green, Forward Current=20mA, Forward Voltage=2.2V, Manufacturer=Broadcom, Max Junction Temp=+95°C, Power Dissipation=65mW, Reverse Voltage=5V, Temperature="-40°C to +85°C", Temperature Range High=+85°C, Temperature Range Low=-40°C, Automotive=No, Category=Diode, ComponentLink2Description=Datasheet, ComponentLink2URL=https://docs.broadcom.com/docs/AV02-0551EN, Device Class L1=Optoelectronics, Device Class L2=LEDs, Device Class L3=unset, Digikey Description="LED GREEN DIFFUSED 1206 SMD", Height=1.2mm, Ipc Land Pattern Name=DIOCP320160X55, Lead Free=Yes, Led Orientation="Top View", Luminous Intensity=15mcd, Manufacturer Part Number=HSMG-C150, Mouser Description="LED Uni-Color Green 570nm 2-Pin Chip LED T/R", Octopart=https://octopart.com/hsmg-c150-broadcom-71131304, Package=HSMG-C150, Peak Emmision Wavelength=570nm, RoHS=TRUE, Viewing Angle=170°, Wavelength=572nm
IC1: "Integrated Circuit", Manufacturer_Name="Sharp Microelectronics", Height=3mm, Manufacturer_Part_Number=PC357N14J00F
IC2: "Integrated Circuit", Arrow Part Number=TLP350(TP1,F), Manufacturer_Name=Toshiba, Mouser Part Number=757-TLP350(TP1,F), Arrow Price/Stock=https://www.arrow.com/en/products/tlp350-tp1f/toshiba?region=asia, Datasheet Link=https://toshiba.semicon-storage.com/info/docget.jsp?did=6217&prodName=TLP350, Height=4.85mm, Manufacturer_Part_Number=TLP350(TP1,F), Mouser Price/Stock=https://www.mouser.co.uk/ProductDetail/Toshiba/TLP350TP1F?qs=f0GatGUIxV3mNWWzK5NBiQ%3D%3D
J2: "Connector", Manufacturer_Name=Molex, Mouser Part Number=538-38720-7502, Datasheet Link=https://componentsearchengine.com/Datasheets/2/38720-7502.pdf, Height=16.8mm, Manufacturer_Part_Number=38720-7502, Mouser Price/Stock=https://www.mouser.co.uk/ProductDetail/Molex/38720-7502?qs=u6Gr9%2FNt%252B%2F8PORak8KlQTw%3D%3D
L1 L2: library part CMP-0220-00014-1, "SMD EMI Suppression Ferrite Bead WE-CBF, Z = 1200 Ohm", ComponentLink1Description="Manufacturer Link", ComponentLink1URL=http://www.we-online.com, ComponentLink2Description=Datasheet, ComponentLink2URL=http://www.we-online.de/katalog/media/pdf/74279216.pdf, DatasheetVersion=Dec-2005, Impedance="1200 Ohm", PackageDescription="Chip Inductor, 2-Leads, Body 3.2 x 1.6 mm", PackageReference=SMD-1206, PackageVersion=2007
L3: library part CMP-0227-00036-2, Ambient Temperature Range High=85°C, Ambient Temperature Range Low=-40°C, Case Code (Imperial)=1210, Case Code (Metric)=3225, Case/Package=Nonstandard, Current Rating=900mA, DC Resistance (DCR)=930mΩ, Inductance=1mH, Inductance Tolerance=20%, Max Operating Temperature=125°C, Resistance=1.2Ω, Saturation Current=1A, Self Resonant Frequency=1MHz, Test Frequency=1kHz, Composition=Wirewound, Core Material=Ferrite, Depth=12mm, Height=10mm, Height - Seated (Max)=10.0076mm, Lead Pitch=7mm, Length=12mm, Max DC Current=900mA, Min Operating Temperature=-40°C, Mount="Surface Mount", NexarPartId=8917171, Number of Pins=2, Packaging=Digi-Reel®, REACH SVHC=Unknown, RMS Current (Irms)=900mA, RoHS=Compliant, Series Resistance=1.2Ω, Shielding=Shielded, Termination=SMD/SMT, Tolerance=20%, Weight=4.535924g, Width=12mm
PS1: "Power Supply", Manufacturer_Name=Minmax, Datasheet Link=https://www.minmaxpower.com/storage/media/Product-MINMAX/MIWI06/MIWI06_Datasheet.pdf, Manufacturer_Part_Number=MIWI06-24S05
Q1 Q2 Q3 Q4: "MOSFET (N-Channel)", Manufacturer_Name=Infineon, Mouser Part Number=942-IRFS4010PBF, Datasheet Link=http://uk.rs-online.com/web/p/products/6887080, Manufacturer_Part_Number=IRFS4010PBF, Mouser Price/Stock=https://www.mouser.com/Search/Refine.aspx?Keyword=942-IRFS4010PBF
R3: library part CMP-03211-010046-1, "CRGCQ1206 3.3KΩ 0.25W 5% ±100ppm/°C 200V", Ambient Temperature Range High=+70°C, Manufacturer="TE Connectivity", Package=CRGCQ1206, Power Rating=0.25W, Resistance=3.3KΩ, Temperature="-55°C to +155°C", Temperature Coefficient=±100ppm/°C, Temperature Range High=+155°C, Temperature Range Low=-55°C, Tolerance=0.05, Voltage Rating=200V, Automotive=Yes, Automotive Grade="Grade 800", Category=Res, ComponentLink2Description=Datasheet, ComponentLink2URL=https://www.te.com/commerce/DocumentDelivery/DDEController?Action=showdoc&DocId=Data+Sheet%7F1773204-3%7F1%7Fpdf%7FEnglish%7FENG_DS_1773204-3_1.pdf%7F4-2176347-809, Composition="Thick Film", Device Class L1="Passive Components", Device Class L2=Resistors, Device Class L3="Chip SMD Resistors", Height=0.65mm, Ipc Land Pattern Name=RESC310155X55, Lead Free=Yes, Manufacturer Part Number=CRGCQ1206J3K3, Octopart=https://octopart.com/crgcq1206j3k3-te+connectivity-91018329, RoHS=TRUE, Series=CRGCQ
R4 R7: library part CMP-03211-005605-1, "CRGCQ 1206 2K2 5%", Ambient Temperature Range High=+70°C, Manufacturer="TE Connectivity", Package=CRGCQ1206, Power Rating=0.25W, Resistance=2.2KΩ, Temperature="-55°C to +155°C", Temperature Coefficient=±100ppm/°C, Temperature Range High=+155°C, Temperature Range Low=-55°C, Tolerance=0.05, Voltage Rating=200V, Automotive=Yes, Automotive Grade="Grade 758", Category=Res, ComponentLink2Description=Datasheet, ComponentLink2URL=https://www.te.com/commerce/DocumentDelivery/DDEController?Action=showdoc&DocId=Data+Sheet%7F1773204-3%7F1%7Fpdf%7FEnglish%7FENG_DS_1773204-3_1.pdf%7F4-2176347-767, Composition="Thick Film", Device Class L1="Passive Components", Device Class L2=Resistors, Device Class L3="Chip SMD Resistors", Digikey Description="CRGCQ 1206 2K2 5%", Height=0.65mm, Ipc Land Pattern Name=RESC310155X55, Lead Free=Yes, Manufacturer Part Number=CRGCQ1206J2K2, Octopart=https://octopart.com/crgcq1206j2k2-te+connectivity-91018322, RoHS=TRUE, Series=CRGCQ
R5 R13: library part CMP-13261-004377-1, "Res Thick Film 1206 27kΩ 5% 0.25W ±100ppm/°C Molded SMD T/R", Case Code (Imperial)=1206, Case Code (Metric)=3216, Max Operating Temperature=155°C, Max Power Dissipation=250mW, Min Operating Temperature=-55°C, Resistance=27kR, Temperature Coefficient=100ppm/°C, Tolerance=5%, Voltage Rating (DC)=200V, Case/Package=1206, Composition="Thick Film", Contact Plating=Tin, Features="Moisture Resistant", Height=0.026inch, Lead Free="Lead Free", Length=0.126inch, Number of Terminations=2, Packaging="Tape and Reel", Radiation Hardening=No, Width=0.063inch
R6: "Resistor", Manufacturer_Name=Vishay, Mouser Part Number=71-CP001010R00JE66, Arrow Part Number=CP001010R00JE66, Arrow Price/Stock=https://www.arrow.com/en/products/cp001010r00je66/vishay, Datasheet Link=https://www.vishay.com/docs/30113/cphivol.pdf, Height=13.5mm, Manufacturer_Part_Number=CP001010R00JE66, Mouser Price/Stock=https://www.mouser.com/Search/Refine.aspx?Keyword=71-CP001010R00JE66
R8: library part CMP-02407-002229-1, "RES Thick Film, 1.5kΩ, 1%, 0.25W, 100ppm/°C, 1206", Case Code (Imperial)=1206, Case Code (Metric)=3216, Max Operating Temperature=155°C, Max Power Dissipation=250mW, Min Operating Temperature=-55°C, Package Quantity=10, Resistance=1.5kR, Temperature Coefficient=100ppm/°C, Tolerance=1%, Voltage Rating=200V, Case/Package=1206, Composition="Thick Film", Contact Plating=Tin, Depth=1.6mm, Features="Automotive AEC-Q200", Height=0.024inch, Lead Free="Lead Free", Length=3.2mm, Military Standard=Not, Number of Terminations=2, Packaging="Tape and Reel", Power Rating=250mW, Radiation Hardening=No, Termination=SMD/SMT, Voltage Rating (DC)=200V, Weight=0.000353oz, Width=0.063inch
R9 R11: library part CMP-2003-04405-1, Manufacturer=Panasonic, Part Number=ERA8AEB101V
R10: library part CMP-03211-006652-1, "CRGCQ1206 3.3KΩ 0.25W 1% ±100ppm/°C 200V", Ambient Temperature Range High=+70°C, Manufacturer="TE Connectivity", Package=CRGCQ1206, Power Rating=0.25W, Resistance=3.3KΩ, Temperature="-55°C to +155°C", Temperature Coefficient=±100ppm/°C, Temperature Range High=+155°C, Temperature Range Low=-55°C, Tolerance=0.01, Voltage Rating=200V, Automotive=Yes, Automotive Grade="Grade 799", Category=Res, ComponentLink2Description=Datasheet, ComponentLink2URL=https://www.te.com/commerce/DocumentDelivery/DDEController?Action=showdoc&DocId=Data+Sheet%7F1773204-3%7F1%7Fpdf%7FEnglish%7FENG_DS_1773204-3_1.pdf%7F4-2176347-808, Composition="Thick Film", Device Class L1="Passive Components", Device Class L2=Resistors, Device Class L3="Chip SMD Resistors", Height=0.65mm, Ipc Land Pattern Name=RESC310155X55, Lead Free=Yes, Manufacturer Part Number=CRGCQ1206F3K3, Mouser Description="Res Thick Film 1206 3.3K Ohm 1% 0.25W(1/4W) ±100ppm/C Pad SMD Automotive T/R", Octopart=https://octopart.com/crgcq1206f3k3-te+connectivity-91018281, RoHS=TRUE, Series=CRGCQ
R12: library part CMP-2003-00118-2, Case Code (Imperial)=1206, Case Code (Metric)=3216, Max Operating Temperature=155°C, Max Power Dissipation=250mW, Min Operating Temperature=-55°C, Resistance=15kΩ, Temperature Coefficient=100ppm/°C, Tolerance=1%, Voltage Rating=200V, Case/Package=1206, Composition="Thick Film", Contact Plating=Tin, Depth=1.6mm, Features="Automotive AEC-Q200", Height=600µm, Lead Free="Lead Free", Length=3.2mm, Lifecycle Status=Production, Military Standard=Not, Mount="Surface Mount", NexarPartId=55423295, Number of Pins=2, Number of Terminations=2, Packaging="Cut Tape (CT)", Power Rating=250mW, Radiation Hardening=No, REACH SVHC="No SVHC", RoHS=Compliant, Schedule B="8533210045, 8533210045", Termination=SMD/SMT, Voltage Rating (DC)=200V, Width=1.6mm
R14: library part CMP-07231-002641-1, "Thick Film Chip Resistors 1206 1kΩ 0.25W 1% 100ppm/°C", Case Code (Imperial)=1206, Case Code (Metric)=3216, Max Operating Temperature=155°C, Max Power Dissipation=250mW, Min Operating Temperature=-55°C, Package Quantity=1, Resistance=1kR, Temperature Coefficient=100ppm/°C, Tolerance=1%, Voltage Rating=200V, Case/Package=1206, Composition="Thick Film", Contact Plating=Tin, Depth=1.6mm, Features="Moisture Resistant", Height=0.6mm, Length=3.2mm, Military Standard=Not, Mount="Surface Mount", Number of Pins=2, Number of Terminations=2, Packaging="Tape and Reel", Power Rating=250mW, Radiation Hardening=No, REACH SVHC="No SVHC", Termination=SMD/SMT, Thickness=610um, Voltage Rating (DC)=200V, Width=1.6mm
R15: library part CMP-2003-04807-2, "RES Thick Film, 10kΩ, 1%, 0.25W, 100ppm/°C, 1206", Case Code (Imperial)=1206, Case Code (Metric)=3216, Max Operating Temperature=155°C, Max Power Dissipation=250mW, Min Operating Temperature=-55°C, Package Quantity=10, Resistance=10kR, Temperature Coefficient=100ppm/°C, Tolerance=1%, Voltage Rating=200V, Case/Package=1206, Composition="Thick Film", Contact Plating=Tin, Depth=1.6mm, Features="Automotive AEC-Q200", Height=0.55mm, Lead Free="Lead Free", Length=3.2mm, Military Standard=Not, Number of Pins=2, Number of Terminations=2, Packaging="Tape and Reel", Power Rating=250mW, Radiation Hardening=No, Termination=SMD/SMT, Voltage Rating (DC)=200V, Weight=0.000353oz, Width=0.063inch, Working Voltage=200V
R16: library part CMP-03211-005605-1, "CRGCQ 1206 2K2 5%", Ambient Temperature Range High=+70°C, Manufacturer="TE Connectivity", Manufacturer Part Number=CRGCQ1206J2K2, Package=CRGCQ1206, Power Rating=0.25W, Resistance=2.2KΩ, Temperature="-55°C to +155°C", Temperature Coefficient=±100ppm/°C, Temperature Range High=+155°C, Temperature Range Low=-55°C, Tolerance=0.05, Voltage Rating=200V, Automotive=Yes, Automotive Grade="Grade 758", Category=Res, ComponentLink2Description=Datasheet, ComponentLink2URL=https://www.te.com/commerce/DocumentDelivery/DDEController?Action=showdoc&DocId=Data+Sheet%7F1773204-3%7F1%7Fpdf%7FEnglish%7FENG_DS_1773204-3_1.pdf%7F4-2176347-767, Composition="Thick Film", Device Class L1="Passive Components", Device Class L2=Resistors, Device Class L3="Chip SMD Resistors", Digikey Description="CRGCQ 1206 2K2 5%", Height=0.65mm, Ipc Land Pattern Name=RESC310155X55, Lead Free=Yes, Octopart=https://octopart.com/crgcq1206j2k2-te+connectivity-91018322, RoHS=TRUE, Series=CRGCQ
R17: library part CMP-03211-007361-1, "CRGCQ 1206 1K2 1%", Ambient Temperature Range High=+70°C, Manufacturer="TE Connectivity", Manufacturer Part Number=CRGCQ1206F1K2, Package=CRGCQ1206, Power Rating=0.25W, Resistance=1.2KΩ, Temperature="-55°C to +155°C", Temperature Coefficient=±100ppm/°C, Temperature Range High=+155°C, Temperature Range Low=-55°C, Tolerance=0.01, Voltage Rating=200V, Automotive=Yes, Automotive Grade="Grade 701", Category=Res, ComponentLink2Description=Datasheet, ComponentLink2URL=https://www.te.com/commerce/DocumentDelivery/DDEController?Action=showdoc&DocId=Data+Sheet%7F1773204-3%7F1%7Fpdf%7FEnglish%7FENG_DS_1773204-3_1.pdf%7F4-2176347-710, Composition="Thick Film", Device Class L1="Passive Components", Device Class L2=Resistors, Device Class L3="Chip SMD Resistors", Digikey Description="CRGCQ 1206 1K2 1%", Height=0.65mm, Ipc Land Pattern Name=RESC310155X55, Lead Free=Yes, Mouser Description="Res Thick Film 1206 1.2K Ohm 1% 0.25W(1/4W) ±100ppm/C Pad SMD Automotive T/R", Octopart=https://octopart.com/crgcq1206f1k2-te+connectivity-91018259, RoHS=TRUE, Series=CRGCQ
U1: library part CMP-04918-000633-1, "IC REG BUCK 12V 3A TO263-5", Case/Package=TO-263, Max Input Voltage=60V, Max Operating Temperature=125°C, Max Output Current=3A, Min Input Voltage=4V, Min Operating Temperature=-40°C, Min Supply Voltage=7V, Nominal Supply Current=5mA, Output Voltage=12V, Package Quantity=500, Switching Frequency=58kHz, Efficiency=88%, Lead Free="Contains Lead", Mount="Surface Mount", Number of Outputs=1, Operating Supply Voltage=60V, Output Current=3A, Output Type=Fixed, Packaging="Tape and Reel", Quiescent Current=5mA, Radiation Hardening=No, RoHS Compliant=Yes, Series=LM2576HV, Supply Current=5mA, Synchronous Rectifier=No

## Nets (pads, with @x,y where several pads share a name; then routed paths per layer and width w, separated by ;. In a path a pad name is that pad's centre, name@x,y a point inside that pad or via, vN(x,y) a via of type N, cw(c..) or ccw(c..) an arc to the next point about the centre after c; other vN are vias at no path point)
+5v: D1.2
+5v_uc: C6.2 C9.2 C10.2 D?.2 PS1.14
+12v: C5.2 C7.2 C8.2 C13.1 C17.1 D7.2 D9.2 D12.2 L3.2 PS1.22 PS1.23 R15.2
+12v_B: C4.1 IC2.8
+12v_D: IC1.4
+48v: D10.2 J2.2
+48v_F: 
-12v_B: C4.2 IC2.5
AGND: C3.2 D1.1 R7.1
ARC_Out: D3.2 D4.2 D5.2 D8.2
GND_B: D3.1 D3.3 D4.1 D4.3 D5.1 D5.3 D6.4 D8.1 D8.3 Q2.2 Q3.2 R10.1 R12.2
GND_D: C1.1 Q1.2 Q2.3 Q3.3 R4.1 R5.1 R6.2
GND_IN: C1.2 C2.2 C5.1 C7.1 C8.1 C11.1 C12.1 C13.2 C14.1 C15.1 C16.2 C17.2 C18.2 D6.1 D6.3 D9.1 D11.2 J2.1 PS1.2 PS1.3 Q4.2 R3.1 R8.1 R12.1 R16.1 R17.1 U1.3 U1.5 U1.6
GND_uc: C6.1 C9.1 C10.1 PS1.16 R14.1
NetC2_1: C2.1 D7.1 R13.1
NetC3_1: C3.1 D1.3 R5.2 R7.2
NetC11_2: C11.2 C12.2 C14.2 C15.2 C16.1 D10.1 U1.1
NetC18_1: C18.1 R15.1 R17.2 U1.4
NetD2_1: D2.1 D2.3
NetD2_4: D2.4 Q1.3
NetD11_1: D11.1 L3.1 U1.2
NetD12_1: D12.1 R16.2
NetD?_1: D?.1 R14.2
NetIC1_1: IC1.1
NetIC1_2: IC1.2 R3.2
NetIC1_3: IC1.3 R4.2
NetIC2_2: IC2.2
NetIC2_3: IC2.3 R8.2
NetIC2_6: IC2.6 L1.1 L2.1 R10.2
NetL1_2: L1.2 R9.1
NetL2_2: L2.2 R11.1
NetQ1_1: Q1.1
NetQ2_1: Q2.1 R11.2
NetQ3_1: Q3.1 R9.2
NetQ4_1: Q4.1 R13.2
NetQ4_3: Q4.3 R6.1
pads on no net: IC2.1 IC2.4 IC2.7 PS1.11

## Polygon pours and split planes (outlines as drawn)
no net on Layer 1 (split plane): 177.29,25.91 25.91,25.91 25.91,126.49 177.29,126.49